# Altium PCB Slave.PcbDoc
Units mil, origin at the board's own origin, x right, y up, seen from the top; angles counter-clockwise.
Board outline 6000 x 4000 mil, 2 copper layers (Top Layer, Bottom Layer); 24 components, 17 nets, 100 pads, 0 vias.
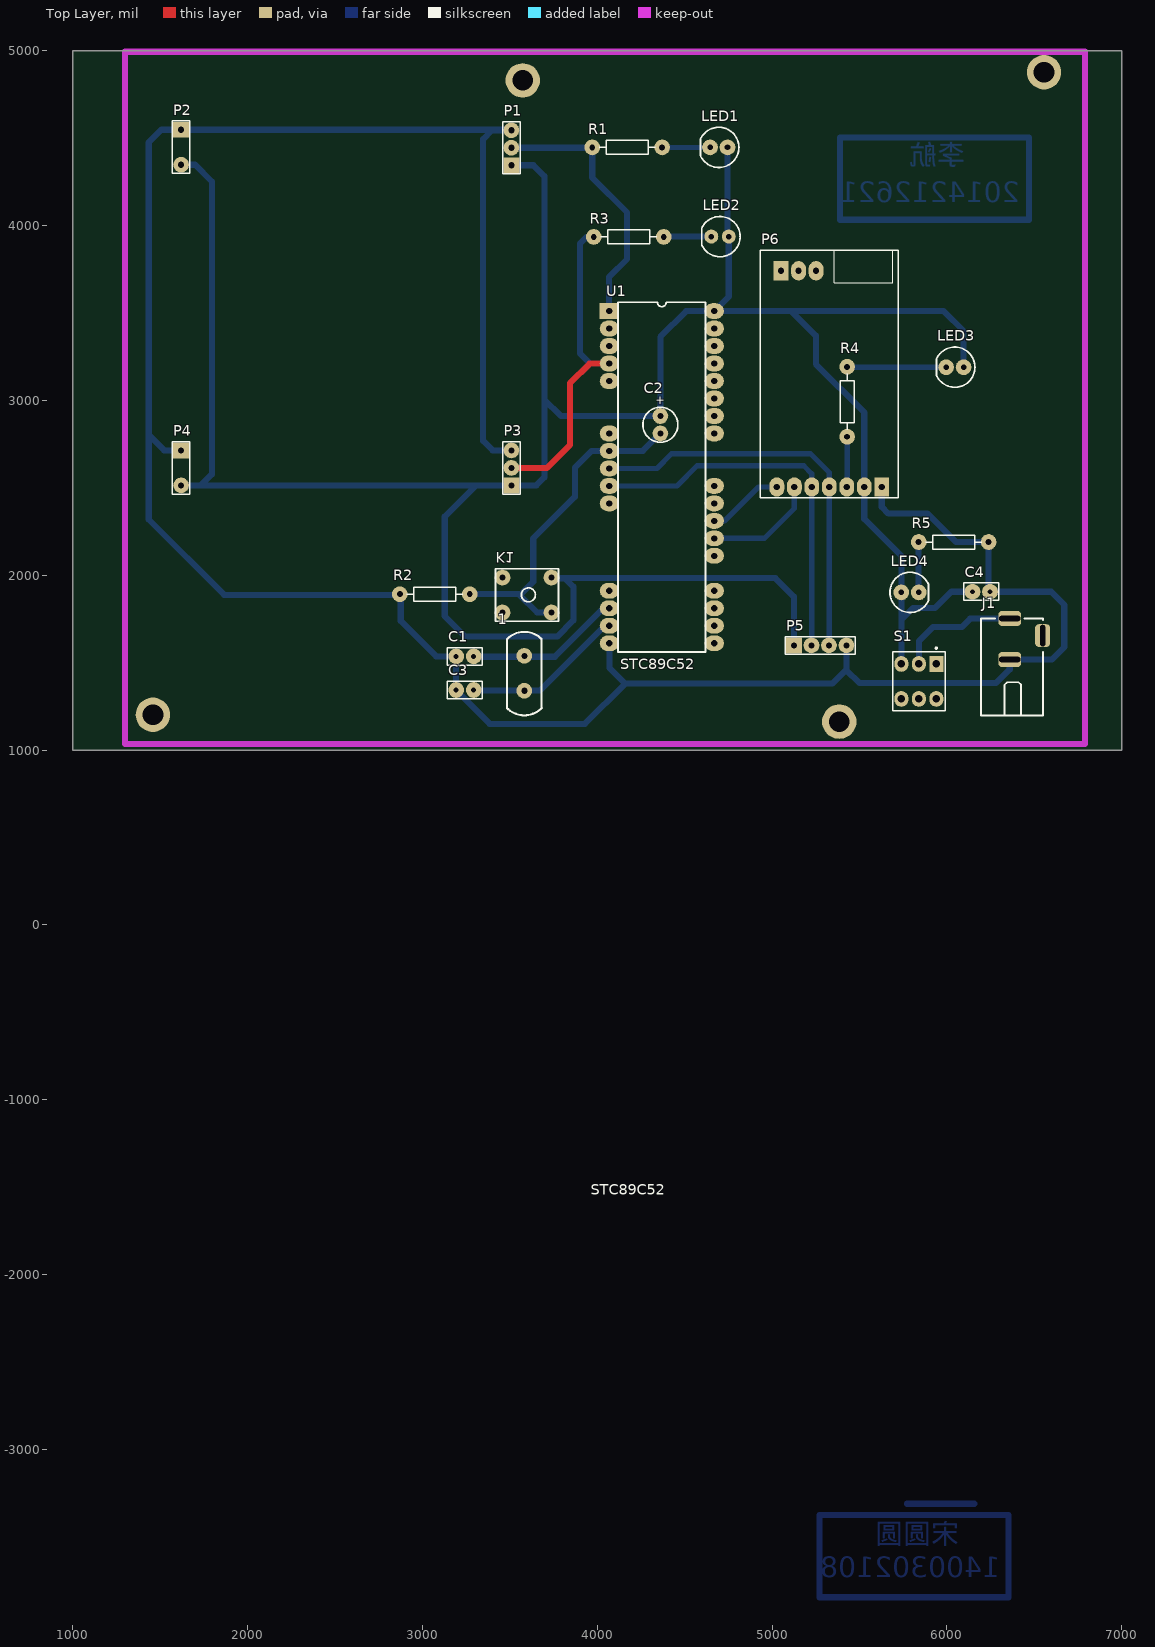
[diagram p0: Top Layer view]
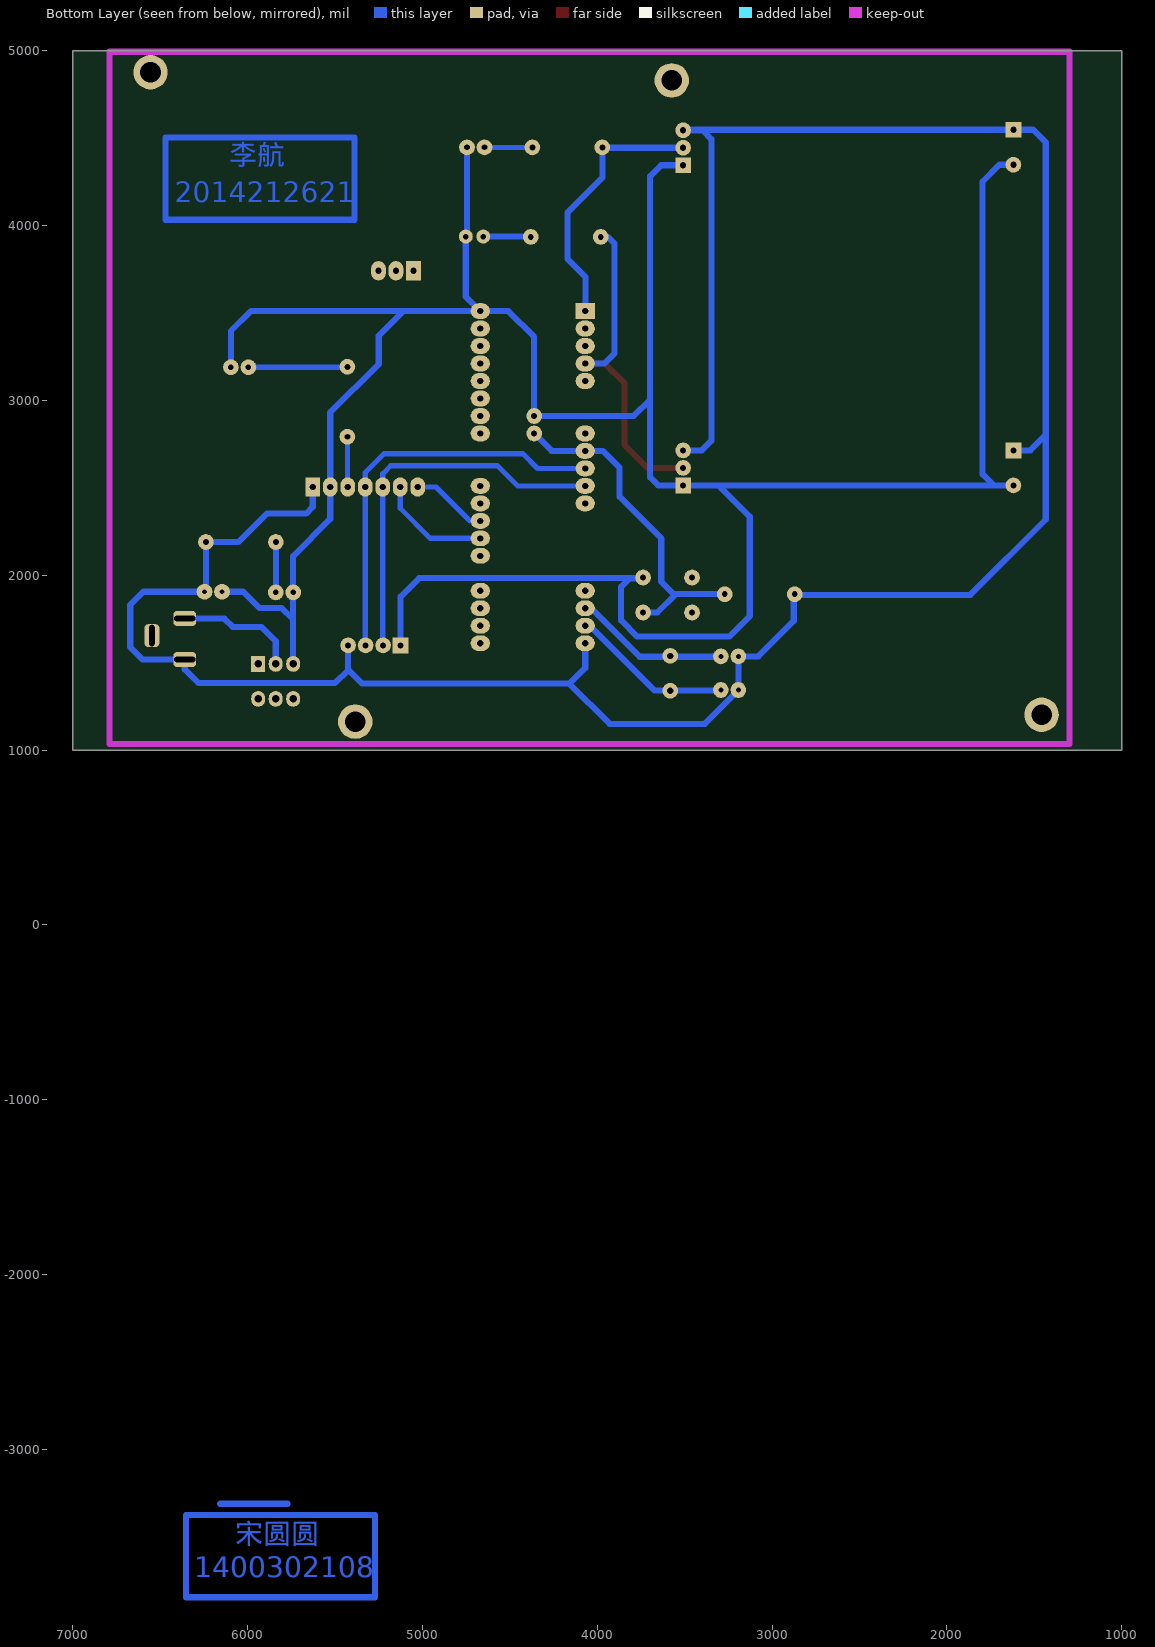
[diagram p1: Bottom Layer view, seen from below]

## Layer stack, top to bottom
Top Layer: signal copper 1.4
Dielectric: dielectric 12.6, FR-4, Dk 4.8
Bottom Layer: signal copper 1.4

## Board outline
1000,1000 7000,1000 7000,5000 1000,5000

## Design rules (kind name [scope] priority, off if disabled: settings)
Clearance [All] p1: gap=10
PolygonConnect [All] p1: connectstyle=Relief reliefconductorwidth=10 reliefentries=4 polygonreliefangle="90 Angle" airgapwidth=10
RoutingVias [All] p1: holewidth=28 width=50 viastyle="Through Hole" minholewidth=28 minwidth=50 maxholewidth=28 maxwidth=50
SolderMaskExpansion [All] p1: expansion=4
Width [All] p1: maxlimit=35 minlimit=10 preferedwidth=30
28 further rules are at their usual default settings.

## Classes and differential pairs
component class Slave: 1 C1 C2 C3 C4 J1 K1 LED1 LED2 LED3 P1 P2 P3 P4 P6 R1 R2 R3 R4 R5 S1 U1

## Components (designator, comment, footprint, x,y, rotation, side; value= is the part's Value field where it differs from the comment)
1 "XTAL" XTAL 3583,1439 r90 top
C1 "Cap" RAD-0.1 3243,1536 r0 top
C2 "Cap Pol1" RB.1/.2 4361,2861 r90 top
C3 "Cap" RAD-0.1 3243,1344 r0 top
C4 "Cap" RAD-0.1 6196,1906 r180 top
J1 "DC-05" DC-05 6359,1753 r0 top
K1 "四脚按键" 四脚按键 3738,1787 r90 top
LED1 "LED" LED#1 4745,4447 r180 top
LED2 "LED" LED#2 4752,3937 r180 top
LED3 "LED" LED#1 6095,3190 r180 top
LED4 "LED" LED#1 5739,1902 r0 top
P1 "接收管1" HDR1X3 3509,4345 r90 top
P2 "发射管1" CON2 1620,4548 r270 top
P3 "接收管2" HDR1X3 3509,2514 r90 top
P4 "发射管2" CON2 1620,2714 r270 top
P5 "下载口" HDR1X4 5125,1599 r0 top
P6 "无线串口模块" AS32-TTL-100 5627,2505 r90 top
R1 "Res2" AXIAL-0.4 4171,4447 r0 top
R2 "Res2" AXIAL-0.4 3071,1892 r180 top
R3 "Res2" AXIAL-0.4 4180,3935 r0 top
R4 "Res2" AXIAL-0.4 5429,2992 r270 top
R5 "Res2" AXIAL-0.4 6038,2190 r0 top
S1 "SW-DPDT" SWITCH_B1 5839,1393 r270 top
U1 "STC89C51" DIP-40 4069,3511 r0 top

## Footprints (in the part's own frame and the unit in brackets; to place one, negate y for a bottom-side part, rotate by r counter-clockwise, add the part's x,y. Pads: shape width x height; smd on the part's side, far side on the other; paste and mask are expansions set on the pad)
AS32-TTL-100 [mil]
  rect 110x85 hole 35.43 mask+1.97: 1(0,0) 1(1236.22,575.59)
  oval 110x85 hole 35.43 mask+1.97: 2(0,100) 2(1236.22,475.59) 3(0,200) 3(1236.22,375.59) 4(0,300) 5(0,400) 6(0,500) 7(0,600)
  silkscreen extent -63,-94 1355,694
AXIAL-0.4 [mil] "Axial Device, Thru-Hole; 2 Leads; 0.4 in Pin Spacing"
  round 90 hole 33.46: 1(-200,0) 2(200,0)
  silkscreen extent -160,-40 160,40
CON2 [mil]
  rect 90x90 hole 35.43: 1(0,0)
  round 90 hole 35.43: 2(200,0)
  silkscreen extent -50,-50 250,50
DC-05 [mil]
  rrect50% 129.92x86.61 hole 30 slot 122.05 at 0 deg: 1(0,0) 2(0,-235)
  rrect50% 86.61x129.92 hole 30 slot 122.05 at 90 deg: 3(188,-98)
  silkscreen extent -165,-555 190,0
DIP-40 [mil]
  rect 110x90 hole 35.43: 1(0,0)
  oval 110x90 hole 35.43: 2(0,-100) 3(0,-200) 4(0,-300) 5(0,-400) 8(0,-700) 9(0,-800) 10(0,-900) 11(0,-1000) 12(0,-1100) 17(0,-1600) 18(0,-1700) 19(0,-1800) 20(0,-1900) 21(600,-1900) 22(600,-1800) 23(600,-1700) 24(600,-1600) 26(600,-1400) 27(600,-1300) 28(600,-1200) 29(600,-1100) 30(600,-1000) 33(600,-700) 34(600,-600) 35(600,-500) 36(600,-400) 37(600,-300) 38(600,-200) 39(600,-100) 40(600,0)
  silkscreen extent 50,-1950 550,50
HDR1X3 [mil] "Connector; Header; 3 Position"
  rect 90x90 hole 35.43: 1(0,0)
  round 90 hole 35.43: 2(100,0) 3(200,0)
  silkscreen extent -50,-50 250,50
HDR1X4 [mil] "Connector; Header; 4 Position"
  rect 90x90 hole 35.43: 1(0,0)
  round 90 hole 35.43: 2(100,0) 3(200,0) 4(300,0)
  silkscreen extent -50,-50 350,50
LED#1 [mil]
  round 90 hole 32: 1(0,0) 2(100,0)
  silkscreen extent -65,-115 155,115
LED#2 [mil]
  round 80 hole 32: 1(0,0) 2(100,0)
  silkscreen extent -65,-115 155,115
RAD-0.1 [mil] "Radial Cap, Thru-Hole; 2 Leads; 0.1 in Pin Spacing"
  round 90 hole 27.56: 1(-50,0) 2(50,0)
  silkscreen extent -100,-50 100,50
RB.1/.2 [mil]
  round 90 hole 35: 1(50,0) 2(-50,0)
  silkscreen extent -100,-100 100,100
SWITCH_B1 [mil] "单刀"
  rect 90x80 hole 43.31: 1(-100,100)
  oval 90x80 hole 43.31: 2(-100,0) 3(-100,-100) 4(100,-100) 5(100,0) 6(100,100)
  silkscreen extent -195,-150 169,150
XTAL [mil]
  round 90 hole 35.43: 1(-100,0) 2(100,0)
  silkscreen extent -240,-100 238,100
四脚按键 [mil]
  round 90 hole 35.43: 1(0,0) 2(200,0) 3(0,280) 4(200,280)
  silkscreen extent -50,-40 250,320

## Part data
1: "Crystal Oscillator"
C1 C3 C4: "Capacitor"
C2: "Polarized Capacitor (Radial)"
P1 P3: library part "Header 3", "Header, 3-Pin"
P2 P4: library part "Header 2", "Header, 2-Pin"
P5: library part "Header 4", "Header, 4-Pin"
P6: library part "Header 7", "Header, 7-Pin"
R1 R2 R3 R4 R5: "Resistor"
S1: "单刀双掷开关"

## Free pads (board coordinates)
  round 196.85 hole 118.11: 1(3574,4830) 2(1459,1202) 3(6555,4877) 4(5384,1163)

## Nets (pads, with @x,y where several pads share a name; then routed paths per layer and width w, separated by ;. In a path a pad name is that pad's centre, name@x,y a point inside that pad or via, vN(x,y) a via of type N, cw(c..) or ccw(c..) an arc to the next point about the centre after c; other vN are vias at no path point)
AUX: P6.3@5427,2505 R4.2 | length 287.8
  Bottom Layer w30: P6.3@5427,2505 5429,2507 R4.2
GND: C1.1 C3.1 C4.1 J1.2 P1.3 P2.1 P3.3 P4.1 P5.4 P6.1@5627,2505 R2.2 R5.2 U1.20 | length 14975.2
  Bottom Layer w35: P4.1 1523,2714 1437,2800 1435,2800 ; P3.3 3402,2714 3347,2769 3347,4494 3398,4545 P1.3 ; P1.3@3509,4548 P2.1 1507,4548 1435,4476 1435,2800 ; U1.20 4069,1470 4159,1380 ; 5423.5,1459.5 5344,1380 4159,1380 ; P5.4 5425,1458 5500,1383 6280,1383 6359,1462 J1.2 6601,1518 6601,1519 6671,1589 6671,1831 6596,1906 C4.1 6238,1914 R5.2 6052,2190 5889,2353 5665,2353 5627,2391 P6.1@5627,2505 ; 1435,2800 1435,2319 1866,1888 2876,1888 2876,1739 3079,1536 C1.1 C3.1 3193,1341.47 3384.47,1150 3929,1150 4159,1380
M0: P6.7 U1.28 | length 438.4
  Bottom Layer w30: U1.28 4728,2311 4922,2505 P6.7
M1: P6.6 U1.27 | length 651.2
  Bottom Layer w30: U1.27 4955,2211 5127,2383 P6.6
NetJ1_1: J1.1 S1.2 | length 662.4
  Bottom Layer w35: S1.2 5839,1623 5921,1705 6086,1705 6133.37,1752.37 J1.1@6317.79,1752.37
NetLED1_2: LED1.2 R1.2 | length 274
  Bottom Layer w30: R1.2 LED1.2
NetLED2_2: LED2.2 R3.2 | length 270
  Bottom Layer w35: R3.2@4382,3937 LED2.2
NetLED3_2: LED3.2 R4.1 | length 566.8
  Bottom Layer w30: R4.1 5431,3190 LED3.2
NetLED4_2: LED4.2 R5.1 | length 282.8
  Bottom Layer w35: R5.1 5838,1910 LED4.2@5840,1908
OUT1: P1.2 R1.1 U1.1 | length 1519.7
  Bottom Layer w35: P1.2 R1.1@3969,4445 ; R1.1 3971,4274 4170,4075 4170,3808 4068,3706 U1.1@4068,3512
OUT2: P3.2 R3.1 U1.4 | length 1928.8
  Top Layer w35: P3.2 3713,2614 3845,2746 3845,3100 3956,3211 U1.4
  Bottom Layer w35: R3.1 3939,3935 3901,3897 3901,3270 3960,3211 U1.4
RESET: C2.2 K1.1 R2.1 U1.9 | length 1943.7
  Bottom Layer w35: R2.1 3563,1892 ; K1.1 3656,1787 3557,1886 3634,1963 3634,2211 3872,2449 3872,2615 3968,2711 U1.9 4261,2711 C2.2
RX: P5.3 P6.4 U1.10 | length 2323.5
  Bottom Layer w30: U1.10 4341,2611 4425,2695 5219,2695 5327,2587 P6.4 P5.3@5327,1601
TX: P5.2 P6.5 U1.11 | length 2215
  Bottom Layer w30: U1.11@4075,2517 U1.11 4455,2511 4570,2626 5181,2626 5227,2580 P6.5 5227,1601 P5.2
VCC: C2.1 C4.2 K1.2 LED1.1 LED2.1 LED3.1 LED4.1 P1.1 P2.2 P3.1 P4.2 P5.1 P6.2@5527,2505 S1.3 U1.40 | length 16621.9
  Bottom Layer w35: P4.2 1733,2514 ; P2.2 1700,4348 1796,4252 1796,2577 1733,2514 ; 3307,2514 3128,2335 3128,1766 3245,1649 3771,1649 3864,1742 3864,1934 3817,1981 3744,1981 K1.2 ; P1.1 3635,4345 3698,4282 3698,3005 ; K1.2@3743,1984 5018,1984 5125,1877 P5.1 ; LED2.1@4745,3944 LED1.1 ; LED2.1 4752,3594 U1.40 ; S1.3 5740,1494 5740,1747 ; LED3.1 6095,3397 5981,3511 5109,3511 ; C4.2 6025,1906 5931,1812 5805,1812 5740,1747 ; 1733,2514 P3.1 3652,2514 3698,2560 3698,3005 ; 3698,3005 3792,2911 C2.1 4361,3363 4509,3511 U1.40 ; U1.40 5109,3511 ; 5109,3511 5250,3370 5250,3208 5527,2931 5527,2505 5527,2322 5740,2109 5740,1747
XTAL1: 1.1 C3.2 U1.19 | length 929.7
  Bottom Layer w35: C3.2 3295,1342 3673,1342 4042,1711 U1.19
XTAL2: 1.2 C1.2 U1.18 | length 891.6
  Bottom Layer w20: C1.2 C1.2@3293.13,1536.13
  Bottom Layer w35: C1.2 3294.87,1534.13 3758.13,1534.13 4035,1811 U1.18
pads on no net: J1.3 K1.3 K1.4 P6.1@5051.41,3741.22 P6.2@5151.41,3741.22 P6.3@5251.41,3741.22 S1.1 S1.4 S1.5 S1.6 U1.2 U1.3 U1.5 U1.8 U1.12 U1.17 U1.21 U1.22 U1.23 U1.24 U1.26 U1.29 U1.30 U1.33 U1.34 U1.35 U1.36 U1.37 U1.38 U1.39
copper on no net: | length 6655
  Bottom Layer w35: 5271,-3825 5271,-3845 ; 5389,4053 5389,4033 ; 5771,-3310 6156,-3310 ; 6351,-3445 6351,-3375 5271,-3375 5271,-3845 ; 6351,-3430 6351,-3845 5311,-3845 5271,-3845 ; 6469,4433 6469,4503 5389,4503 5389,4033 ; 6469,4448 6469,4033 5429,4033 5389,4033

## Keep-outs
Keep-Out Layer:
  lines w35: 1299,1035 1299,4994 6789,4994 6789,1035 1299,1035

## Other copper
Bottom Layer:
  text "李航" at 6104,4308 h200
  text "2014212621" at 6416,4094 h200
  text "宋圆圆" at 6071,-3580 h200
  text "1400302108" at 6306,-3770 h200

## Silkscreen, mask and mechanical layers (free items; w line width, h text height)
Top Overlay:
  text "STC89C52" at 4131,1463 h60
  text "STC89C52" at 3962,-1543 h60

## Dimensions
1299,1035 to 6789,1035 on Top Overlay
1299,4994 to 1299,1035 on Top Overlay

## Text inside footprints (layer, text, board x,y; h text height)
C2: Top Overlay "+" at 4381,2971 h48 r90